# Altium PCB Display_System_pcb.PcbDoc (part 1 of 3)
Units mm, origin at the board's own origin, x right, y up, seen from the top; angles counter-clockwise.
Board outline 72.5 x 81 mm, 4 copper layers (Top Layer, VCC, GND, Bottom Layer); 86 components, 79 nets, 327 pads, 149 vias.
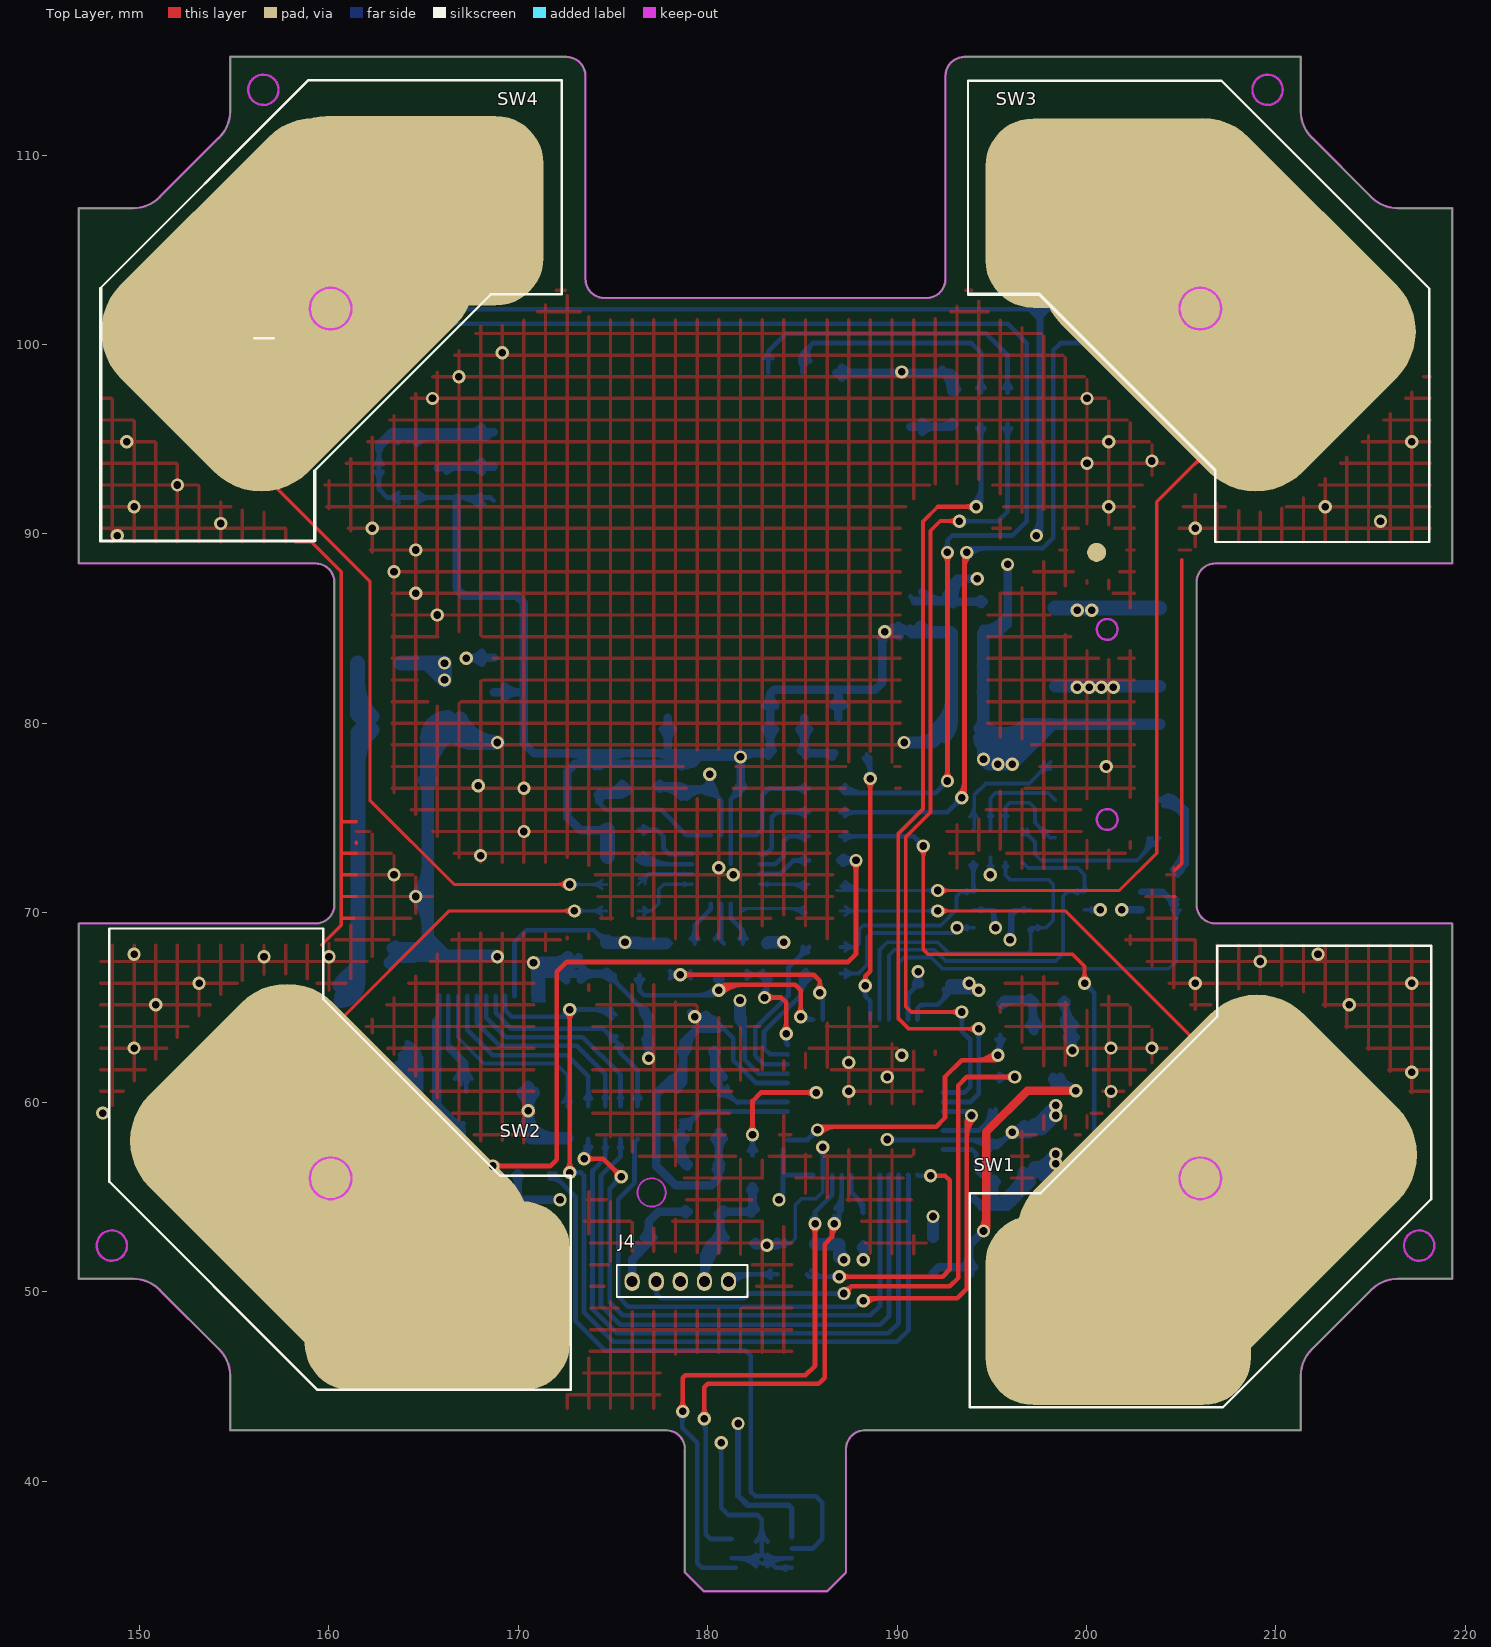
[diagram p0: Top Layer view]
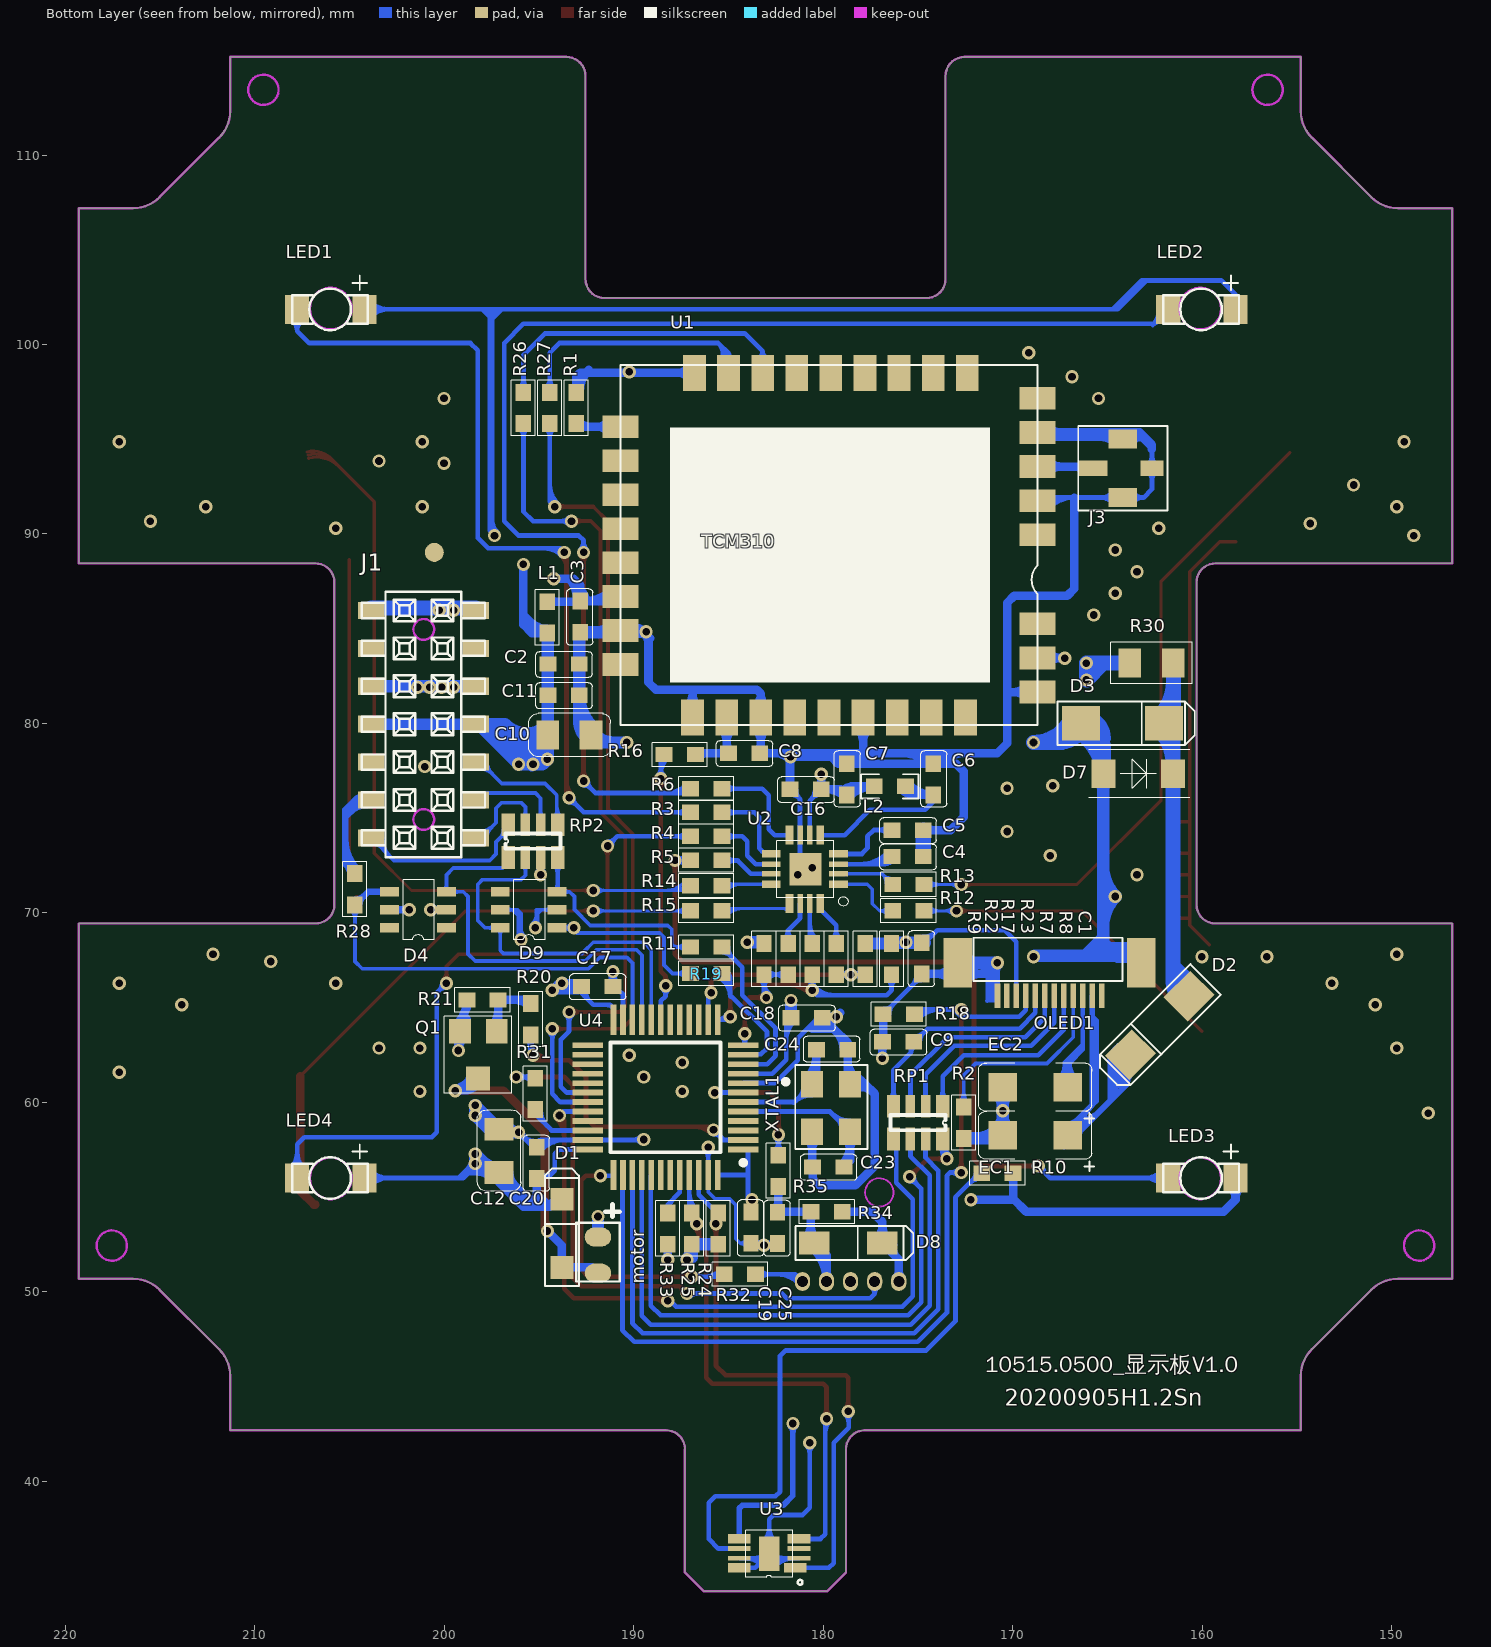
[diagram p1: Bottom Layer view, seen from below]
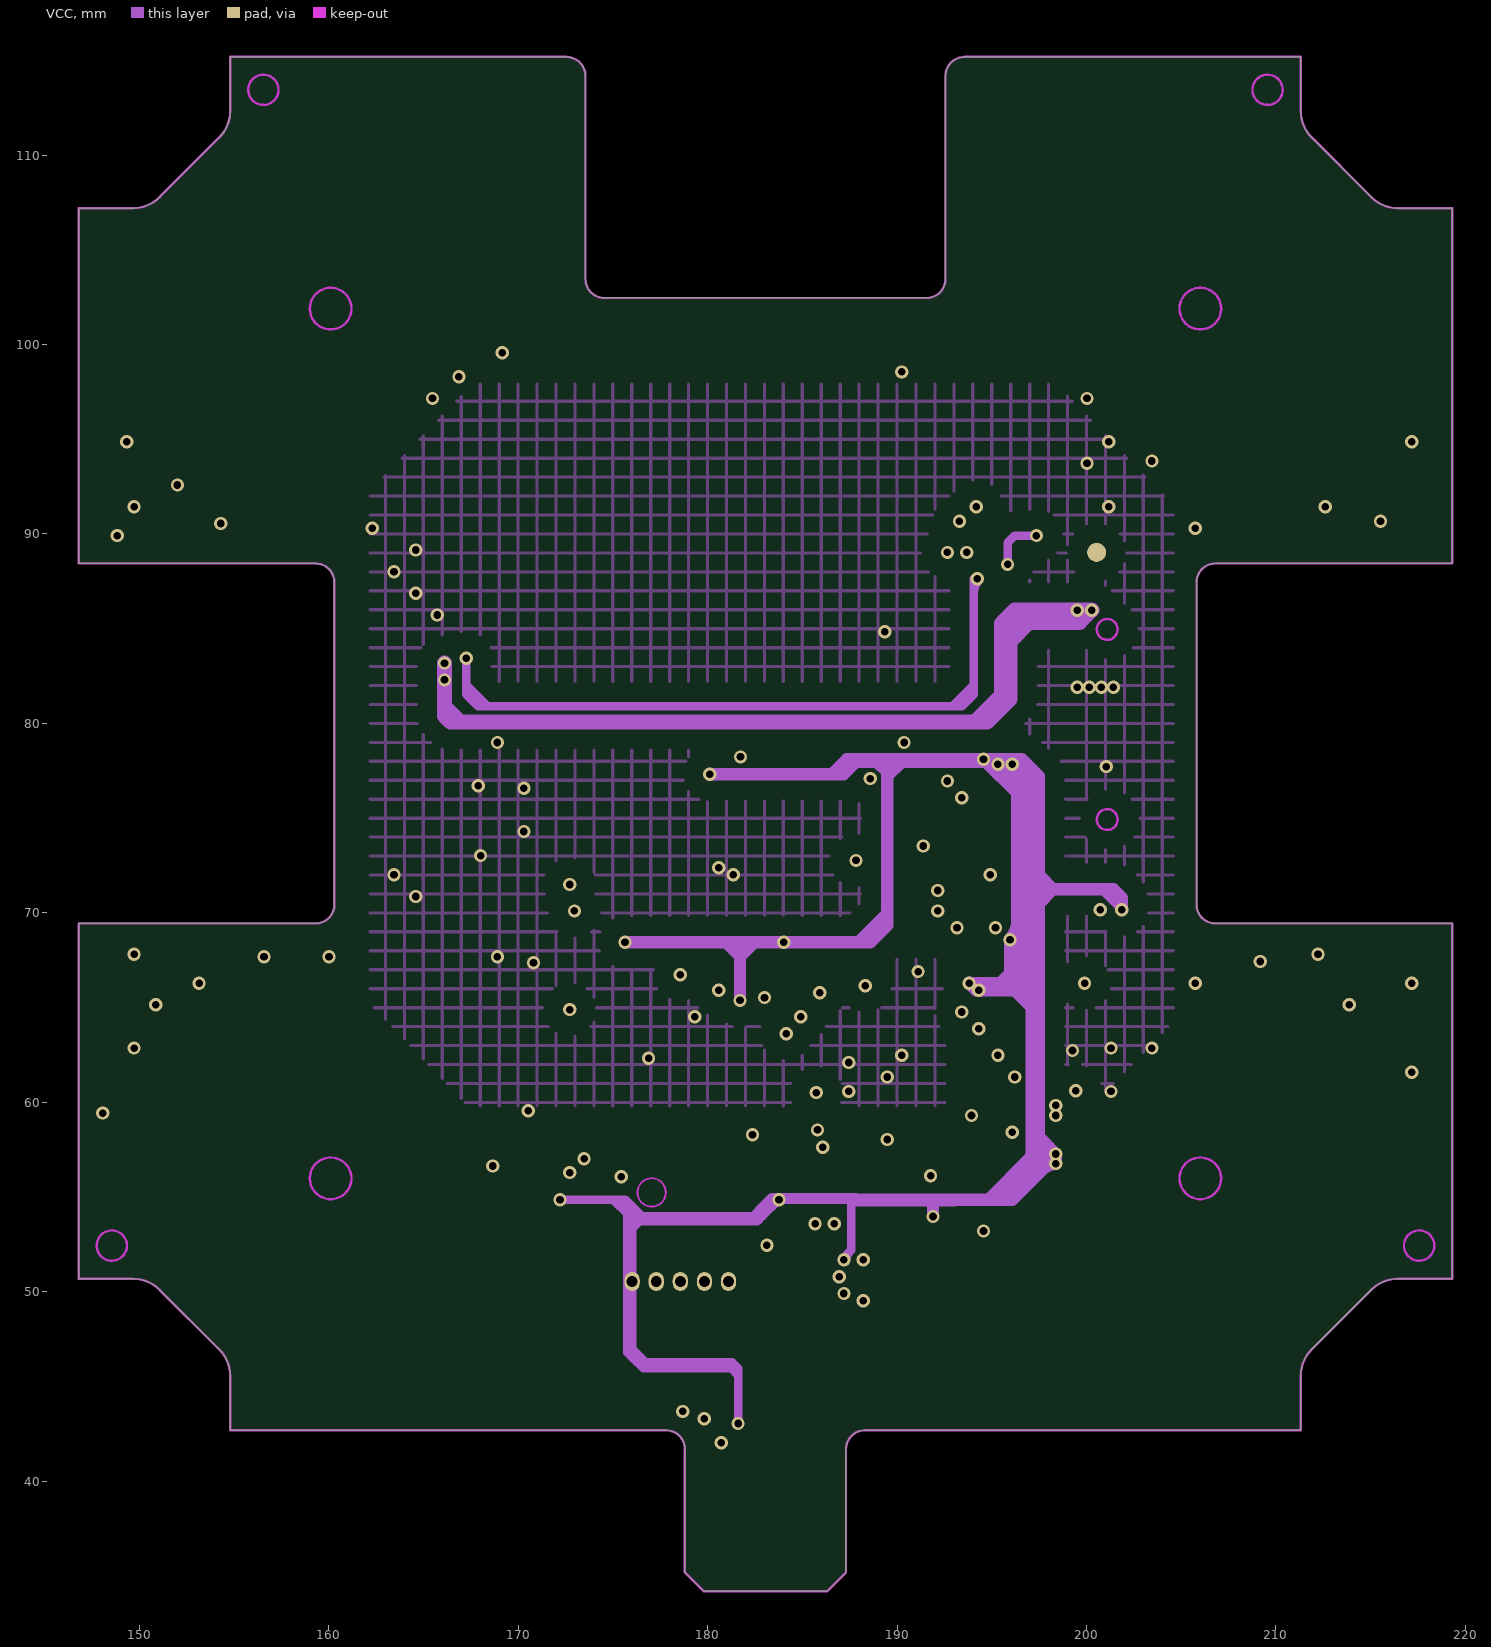
[diagram p2: VCC]
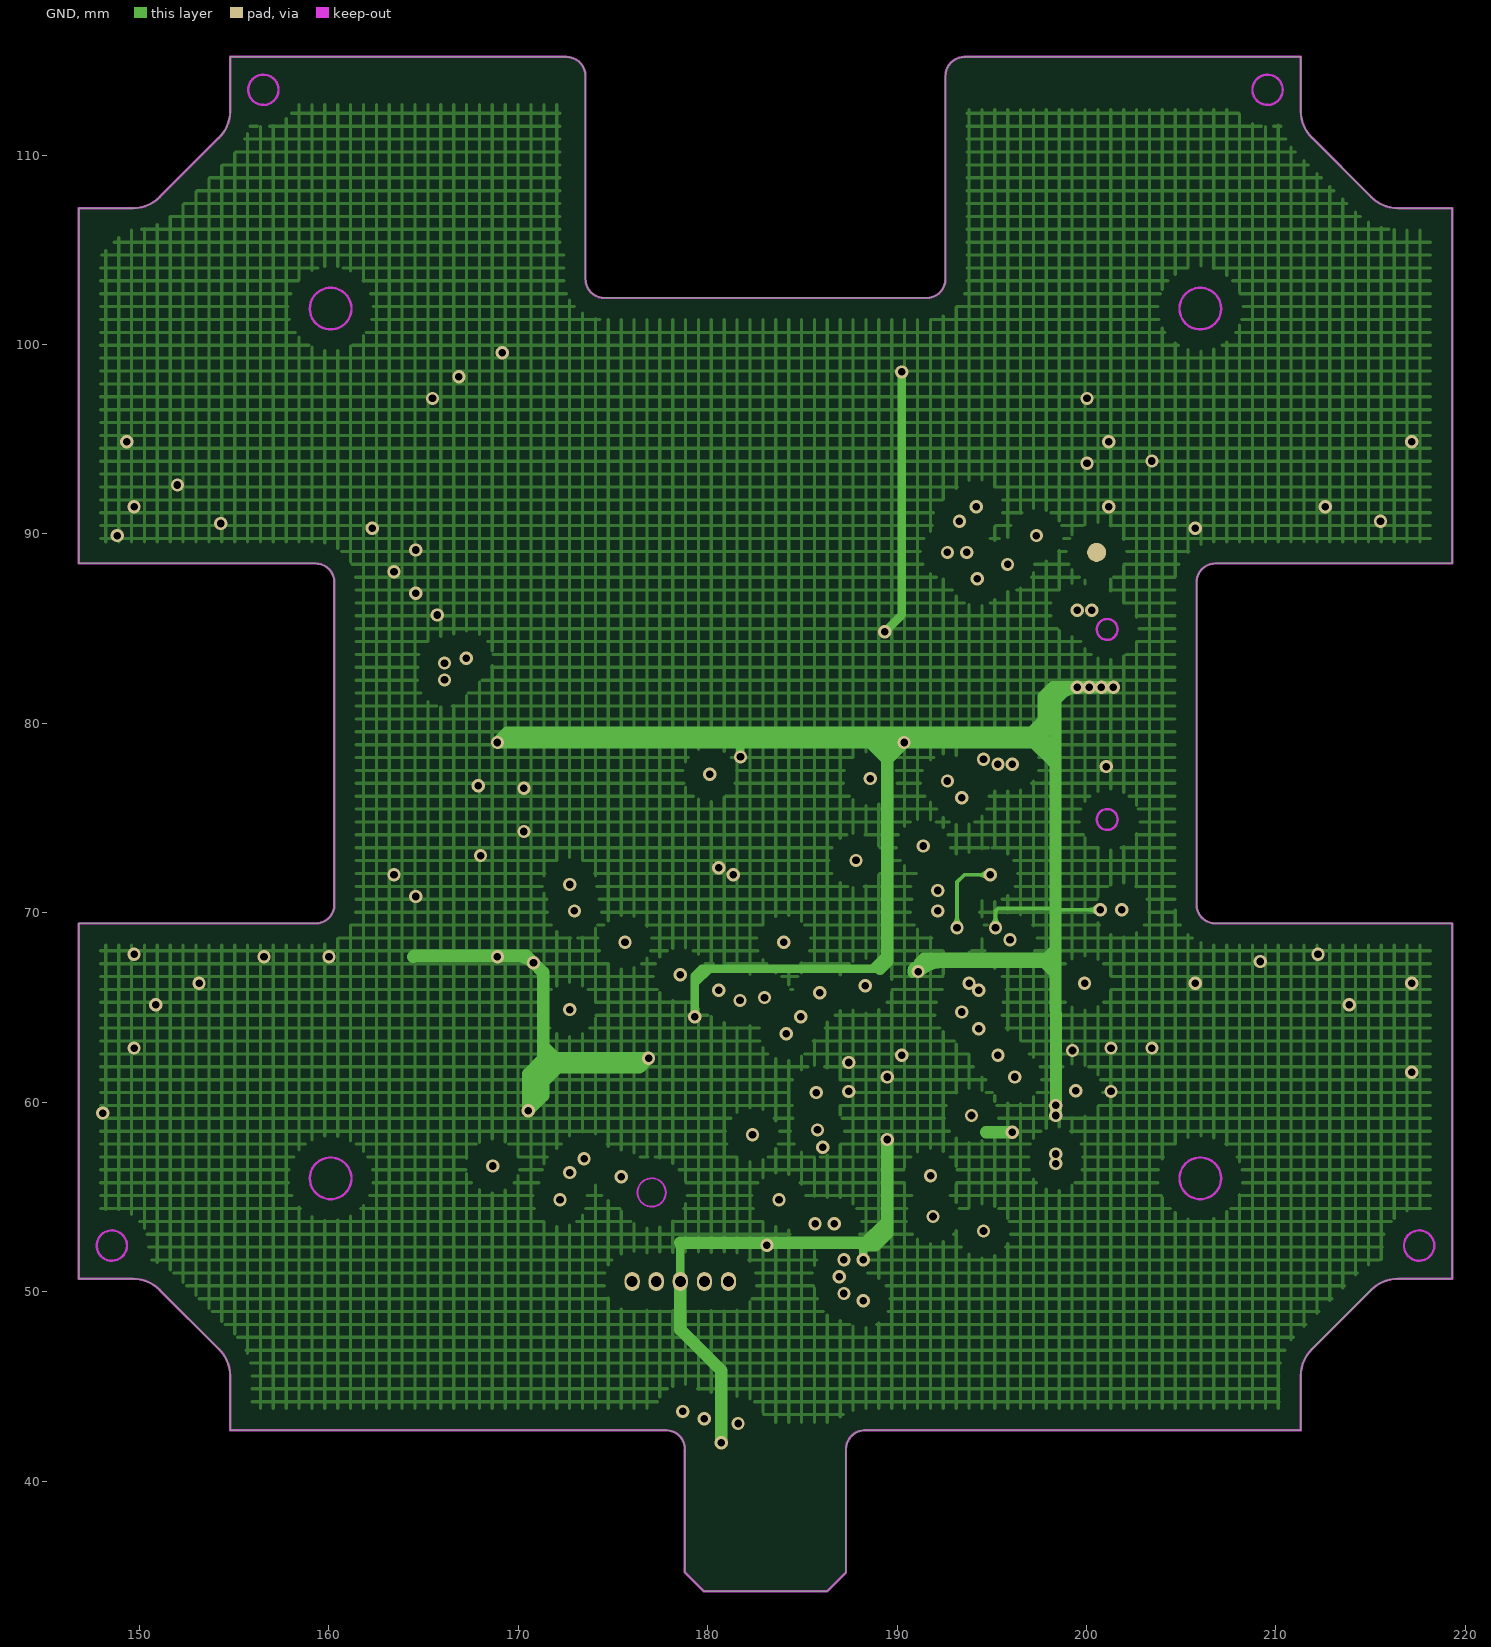
[diagram p3: GND]
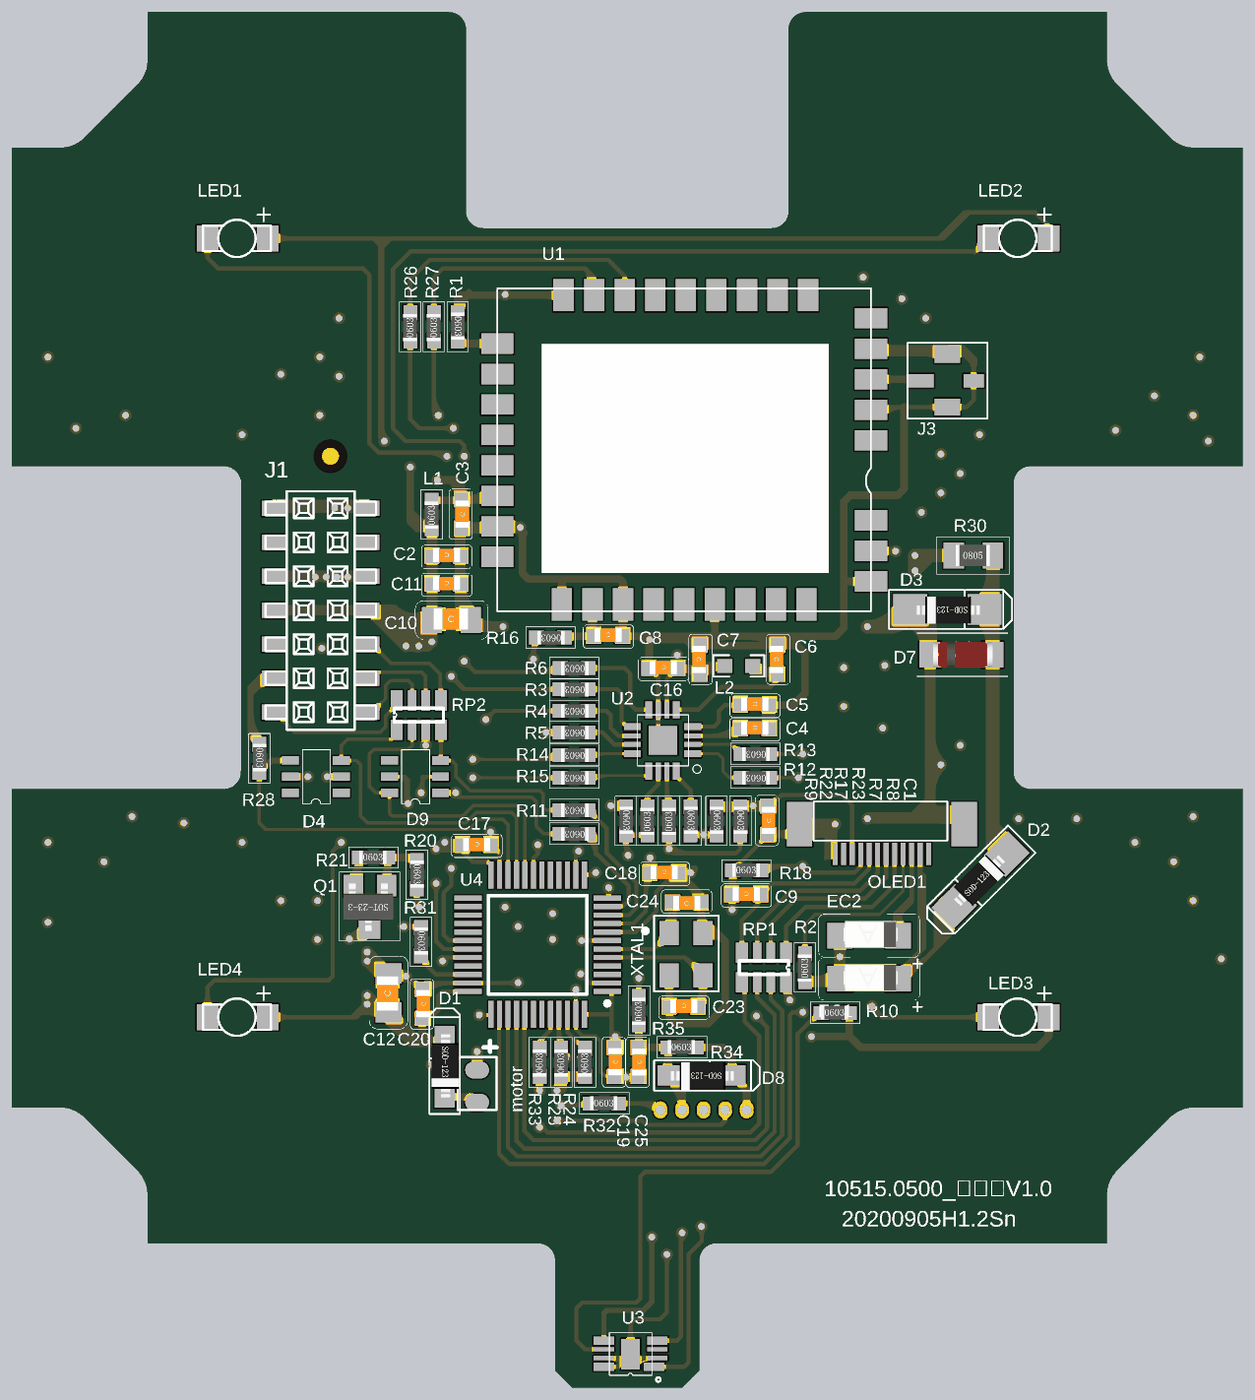
[diagram p6: 3D render of the assembled board from below, using the file's embedded part models]

## Layer stack, top to bottom
Top Layer: signal copper 0.0356
Dielectric: core 0.32, FR-4, Dk 4.8
VCC: signal copper 0.0356
Dielectric: prepreg 0.32, FR-4, Dk 4.8
GND: signal copper 0.0356
Dielectric: core 0.32, FR-4, Dk 4.8
Bottom Layer: signal copper 0.0356

## Board outline
149.667,50.693 cw(c149.667,48.693) 151.081,50.107 154.221,46.967 cw(c152.807,45.553) 154.807,45.553 154.807,42.693 177.807,42.693 cw(c177.807,41.693) 178.807,41.693 178.807,35.193 179.807,34.193 186.307,34.193 187.307,35.193 187.307,41.693 cw(c188.307,41.693) 188.307,42.693 211.307,42.693 211.307,45.553 cw(c213.307,45.553) 211.893,46.967 215.032,50.107 cw(c216.446,48.693) 216.446,50.693 219.307,50.693 219.307,69.443 206.807,69.443 cw(c206.807,70.443) 205.807,70.443 205.807,87.443 cw(c206.807,87.443) 206.807,88.443 219.307,88.443 219.307,107.193 216.446,107.193 cw(c216.446,109.193) 215.032,107.778 211.893,110.918 cw(c213.307,112.332) 211.307,112.332 211.307,115.193 193.557,115.193 193.557,115.173 ccw(c193.557,114.173) 192.557,114.173 192.557,103.455 cw(c191.557,103.455) 191.557,102.455 174.557,102.455 cw(c174.557,103.455) 173.557,103.455 173.557,114.173 ccw(c172.557,114.173) 172.557,115.173 172.557,115.193 154.807,115.193 154.807,112.332 cw(c152.807,112.332) 154.221,110.918 151.081,107.778 cw(c149.667,109.193) 149.667,107.193 146.807,107.193 146.807,88.443 159.307,88.443 cw(c159.307,87.443) 160.307,87.443 160.307,70.443 cw(c159.307,70.443) 159.307,69.443 146.807,69.443 146.807,50.693

## Design rules (kind name [scope] priority, off if disabled: settings)
Clearance Clearance_1 [InPolygon] p1: gap=1
Clearance [All] p2: gap=0.2
HoleSize [All] p1 off: absolutevalues=TRUE maxlimit=2.54 minlimit=0.025 maxpercent=80.000 minpercent=20.000
HoleToHoleClearance [All] p1 off: gap=0.254 allowstackedmicrovias=TRUE
LayerPairs [All] p1 off: enforce=TRUE
MinimumSolderMaskSliver [All] p1 off: minsoldermaskwidth=0.254
NetAntennae [All] p1 off: netantennaetolerance=0
PolygonConnect PolygonConnect_1 [IsVia] p1: connectstyle=Direct reliefconductorwidth=0.254 reliefentries=4 polygonreliefangle="90 Angle"
PolygonConnect [All] p2: connectstyle=Relief reliefconductorwidth=0.254 reliefentries=4 polygonreliefangle="90 Angle"
RoutingVias [All] p1: holewidth=0.711 width=1.27 viastyle="Through Hole" minholewidth=0.711 minwidth=1.27 maxholewidth=0.711 maxwidth=1.27
SilkToSilkClearance [All] p1 off: silktosilkclearance=0.254
SilkscreenOverComponentPads [IsPad] p1 off: minsilkscreentomaskgap=0.254
SolderMaskExpansion [All] p1: expansion=0.102
Width [All] p1: maxlimit=0.8 minlimit=0.15 preferedwidth=0.45
21 further rules are at their usual default settings.

## Components (designator, comment, footprint, x,y, rotation, side; value= is the part's Value field where it differs from the comment)
C1 "0.1uF/0603" CAP/SMT/0603C 174.752,66.802 r90 bottom
C2 "0.1uF/0603" CAP/SMT/0603C 192.913,83.185 r0 bottom
C3 "0.1uF/0603" CAP/SMT/0603C 192.786,84.836 r90 bottom
C4 "2.2nF/0603" CAP/SMT/0603C 174.752,73.025 r0 bottom
C5 "0.1uF/0603" CAP/SMT/0603C 174.752,74.422 r0 bottom
C6 "0.1uF" CAP/SMT/0603C 174.244,77.851 r270 bottom
C7 "0.1uF/0603" CAP/SMT/0603C 178.816,77.851 r270 bottom
C8 "0.1uF" CAP/SMT/0603C 183.388,78.486 r0 bottom
C9 "0.1uF" CAP/SMT/0603C 175.26,63.246 r0 bottom
C10 "22uF/0805" CAP/SMT/0805C 194.564,79.375 r180 bottom
C11 "1uF/0603" CAP/SMT/0603C 192.913,81.534 r0 bottom
C12 "22uF/0805" CAP/SMT/0805C 197.104,56.285 r90 bottom
C16 "0.1uF/0603" CAP/SMT/0603C 180.137,76.581 r0 bottom
C17 "0.1uF/0603" CAP/SMT/0603C 191.135,66.167 r0 bottom
C18 "1uF/0603" CAP/SMT/0603C 180.086,64.516 r0 bottom
C19 "0.1uF/0603" CAP/SMT/0603C 183.769,52.588 r90 bottom
C20 "0.1uF/0603" CAP/SMT/0603C 195.072,56.007 r90 bottom
C23 "20pF/0603" CAP/SMT/0603C 178.943,56.642 r0 bottom
C24 "20pF/0603" CAP/SMT/0603C 180.34,62.738 r180 bottom
C25 "0.1uF/0603" CAP/SMT/0603C 182.372,52.578 r90 bottom
D1 "1N4148/SOD-123" D/SMT/SOD-123#1 193.802,53.086 r270 bottom
D2 "1N4007-SOD123" D/SMT/SOD123 163.957,62.357 r135 bottom
D3 "SMF13CA/SOD-123" D/SMT/SOD123 161.798,80.01 r0 bottom
D4 "SR05-4B/SOT-363" TSOT-6L 199.898,69.215 r0 bottom
D7 "ZMM12V" D/SMT/SOD-80 161.544,77.343 r0 bottom
D8 "1N4148/SOD-123" D/SMT/SOD-123#2 178.689,52.578 r0 bottom
D9 "SR05-4B/SOT-363" TSOT-6L 194.056,69.215 r0 bottom
EC1 "4.7uF/25V" CAP/SMT/TAJA106M010RNJ 167.132,58.166 r0 bottom
EC2 "4.7uF/25V" CAP/SMT/TAJA106M010RNJ 167.132,60.706 r0 bottom
J1 "CON/2X7PIN" CON/SMT/2×7PIN/2.0MM 202.057,75.978 r180 bottom locked
J3 "Antena_W.FL-LP" W.FL.LP-3MM 164.211,93.472 r90 bottom
J4 "CON/DIP/1X5PIN_2MM" CON/DIP/1X5PIN/1.27MM 176.022,50.546 r0 top
L1 "10uH/0603/磁珠" 0603R 194.564,85.598 r90 bottom
L2 "L/10uH" L/SMT/0603L 177.292,76.708 r180 bottom
LED1 "led/1206" D/SMT/LED/1206 207.772,101.854 r180 bottom
LED2 "led/1206" D/SMT/LED/1206 161.798,101.854 r180 bottom
LED3 "led/1206" D/SMT/LED/1206 161.798,56.007 r180 bottom locked
LED4 "led/1206" D/SMT/LED/1206 207.772,56.007 r180 bottom
motor "motor" MOTOR 191.897,51.943 r0 bottom
OLED1 "M80481/SPI" OLED/M80481/6701 170.815,65.77 r0 bottom
Q1 "NPN_SS8050" BJT/SMT/SOT-23 197.231,63.754 r0 bottom
R1 "10K/0603" 0603R 193.04,96.647 r270 bottom
R2 "910K/0603" 0603R 172.593,58.928 r90 bottom
R3 "1K/0603" 0603R 186.182,75.311 r0 bottom
R4 "1K/0603" 0603R 186.182,74.041 r0 bottom
R5 "1K/0603" 0603R 186.182,72.771 r0 bottom
R6 "1K/0603" 0603R 186.182,76.558 r0 bottom
R7 "10K/0603" 0603R 177.8,67.564 r270 bottom
R8 "10K/0603" 0603R 176.403,67.564 r270 bottom
R9 "10K/0603" 0603R 183.134,67.564 r270 bottom
R10 "10K/0603" 0603R 170.815,56.261 r180 bottom
R11 "10R/0603" 0603R 186.182,68.199 r0 bottom
R12 "560R/0603" 0603R 175.514,70.104 r0 bottom
R13 "560R/0603" 0603R 175.514,71.501 r0 bottom
R14 "560R/0603" 0603R 186.182,71.438 r0 bottom
R15 "560R/0603" 0603R 186.182,70.104 r0 bottom
R16 "10R/0603" 0603R 187.579,78.359 r0 bottom
R17 "10R/0603" 0603R 179.324,67.564 r270 bottom
R18 "100R/0603" 0603R 176.022,64.643 r180 bottom
R19 "10R/0603" 0603R 186.182,66.802 r0 bottom
R20 "4.7K/0603" 0603R 195.453,64.389 r270 bottom
R21 "4.7K/0603" 0603R 197.993,65.405 r180 bottom
R22 "10R/0603" 0603R 181.864,67.564 r90 bottom
R23 "10R/0603" 0603R 180.594,67.564 r90 bottom
R24 "10K/0603" 0603R 185.547,53.34 r90 bottom
R25 "10K/0603" 0603R 186.944,53.34 r90 bottom
R26 "10R/0603" 0603R 195.834,96.647 r90 bottom
R27 "10R/0603" 0603R 194.437,96.647 r90 bottom
R28 "10R/0603" 0603R 204.724,71.247 r270 bottom
R30 "PRG21BC2R2MM1RK" 0805R 163.83,83.185 r180 bottom
R31 "20R/0603" 0603R 195.199,60.452 r270 bottom
R32 "20R/0603" 0603R 184.404,50.927 r180 bottom
R33 "10K/0603" 0603R 188.214,53.34 r90 bottom
R34 "10K/0603" 0603R 179.832,54.229 r180 bottom
R35 "430R/0603" 0603R 182.372,56.388 r90 bottom
RP1 "10R/0603/1/8W/±5%" 0603R*4 175.006,58.928 r0 bottom
RP2 "10R/0603/1/8W/±5%" 0603R*4 195.326,73.787 r180 bottom
SW1 "TOUCH" "SWITCH/TOUCH /四叶草"#1 207.01,57.023 r180 top locked
SW2 "TOUCH" "SWITCH/TOUCH /四叶草"#2 161.544,56.007 r90 top locked
SW3 "TOUCH" "SWITCH/TOUCH /四叶草"#3 204.978,102.743 r270 top locked
SW4 "TOUCH" "SWITCH/TOUCH /四叶草"#4 159.131,100.838 r0 top locked
U1 "TCM310" TCM310 179.705,89.408 r0 bottom locked
U2 "CY8CMBR3108" QFN-16 180.975,72.39 r0 bottom
U3 "SENSOR/SHT30" SENSOR/SHT30 181.61,34.925 r0 bottom
U4 "STM32L072CBT6" TQFP48 184.277,57.531 r0 bottom locked
XTAL1 "OSC 12MHZ" OSC/SMT/12M 180.594,60.96 r180 bottom

## Footprints (in the part's own frame and the unit in brackets; to place one, negate y for a bottom-side part, rotate by r counter-clockwise, add the part's x,y. Pads: shape width x height; smd on the part's side, far side on the other; paste and mask are expansions set on the pad)
0603R [mil]
  rect 35x32 smd: 1(-32.5,0) 2(32.5,0)
  silkscreen extent -58,-25 58,25, body extent -33,-15 30,16, height 18
0603R*4 [mm]
  rect 0.7x1.2 smd: 1(-1.3,-0.865) 4(1.3,-0.865) 5(1.3,0.865) 8(-1.3,0.865)
  rect 0.5x1.2 smd: 2(-0.4,-0.865) 3(0.4,-0.865) 6(0.4,0.865) 7(-0.4,0.865)
  silkscreen extent -1.45,-0.4 1.45,0.4
0805R [mm]
  rect 1.2x1.524 smd: 1(0,0) 2(2.3,0)
  silkscreen extent -1,-1.1 3.3,1.1, body extent 0.13,-0.64 2.13,0.62, height 0.55
BJT/SMT/SOT-23 [mm] "transistor 1base 2emitter 3collector"
  rect 1.143x1.27 smd: 1(0,0) 2(1.95,0)
  rect 1.27x1.27 smd: 3(1,2.5)
  silkscreen extent -0.78,-0.8 2.78,3.26, body extent -0.38,-0.13 2.52,2.67, height 1.2
CAP/SMT/0603C [mil]
  rect 35x32 smd: 1(-1,1.97) 2(64,1.97)
  silkscreen extent -28,-24 89,30, body extent -20,-20 82,19, height 35
CAP/SMT/0805C [mm]
  rect 1.2x1.524 smd: 1(0.01,0.01) 2(2.296,0.01)
  silkscreen extent -0.99,-1.13 3.32,1.15, body extent -0.38,-0.64 2.62,0.76, height 0.93
CAP/SMT/TAJA106M010RNJ [mm]
  rect 1.5x1.5 smd: 1(-0.025,-0.102) 2(3.404,-0.102)
  silkscreen extent -1.42,-1.37 4.68,1.8, body extent 0,-0.97 3.2,0.64, height 1.6
CON/DIP/1X5PIN/1.27MM [mm]
  oval 0.8x1 hole 0.58: 1(0,0) 2(1.27,0) 3(2.54,0) 4(3.81,0) 5(5.08,0)
  silkscreen extent -0.81,-0.81 6.1,0.86
CON/SMT/2×7PIN/2.0MM [mm]
  rect 1.4x0.9 smd: 1(-1.803,9.982) 2(-1.803,7.983) 3(-1.803,5.984) 4(-1.803,3.984) 5(-1.803,1.985) 6(-1.803,-0.015) 7(-1.803,-2.014) 8(3.708,9.982) 9(3.708,7.983) 10(3.708,5.984) 11(3.708,3.984) 12(3.708,1.985) 13(3.708,-0.015) 14(3.708,-2.014)
  silkscreen extent -2.3,-3.05 4.2,10.98
D/SMT/LED/1206 [mil]
  rect 50x60 smd: 1(0,0) 2(140,0)
  silkscreen extent -10,-43 147,70
D/SMT/SOD123 [mm]
  rect 2x1.8 smd: 1(0.229,0) 2(4.597,0)
  silkscreen extent -1.4,-1.14 5.84,1.14, body extent 0.21,-2.11 4.51,2.19, height 1.2
D/SMT/SOD-80 [mil]
  rect 50x60 smd: 1(0,0) 2(145,0)
  silkscreen extent -35,-50 175,50, body extent 0,-30 138,29, height 59
D/SMT/SOD-123#1 [mm]
  rect 1.2x1.2 smd: 1(-1.8,0) 2(1.8,0)
  silkscreen extent -3.43,-0.9 2.78,0.9, body extent -1.91,-0.76 1.79,0.84, height 1.2
D/SMT/SOD-123#2 [mm]
  rect 1.6x1.2 smd: 1(-1.8,0) 2(1.8,0)
  silkscreen extent -3.43,-0.9 2.78,0.9, body extent -1.91,-0.76 1.79,0.84, height 1.2
L/SMT/0603L [mil]
  rect 35x32 smd: 1(-1,-1) 2(64,-1)
  silkscreen extent -28,-26 91,24
MOTOR [mm]
  oval 1.4x1 smd: 1(0,0.953) 2(0,-0.953)
  silkscreen extent -1.14,-1.71 1.14,1.4
OLED/M80481/6701 [mm]
  rect 0.3x1.3 smd: 1(0,0.15) 2(-0.5,0.15) 3(-1,0.15) 4(-1.5,0.15) 5(-2,0.15) 6(-2.5,0.15) 7(-3,0.15) 8(-3.5,0.15) 9(-4,0.15) 10(-4.5,0.15) 11(-5,0.15) 12(-5.5,0.15)
  rect 1.5x2.6 smd: 13(-7.6,-1.6) 14(2.1,-1.6)
  silkscreen extent -6.6,-2.92 1.27,-0.64
OSC/SMT/12M [mm]
  rect 1.15x1.4 smd: 1(0,0) 2(0,-2.5) 3(2,-2.5) 4(2,0)
  silkscreen extent -1.52,-3.43 2.92,1.02
QFN-16 [mm]
  rect 1x0.4 smd: 1(-1.778,0.875) 4(-1.778,-0.724) 9(1.778,-0.724) 12(1.778,0.875)
  rect 1x0.3 smd: 2(-1.778,0.326) 3(-1.778,-0.175) 10(1.778,-0.175) 11(1.778,0.326)
  rect 0.4x1 smd: 5(-0.812,-1.714) 8(0.812,-1.714) 13(0.812,1.905) 16(-0.812,1.905)
  rect 0.3x1 smd: 6(-0.254,-1.714) 7(0.254,-1.714) 14(0.254,1.905) 15(-0.254,1.905)
  rect 1.7x1.7 smd: 17(-0.024,0.088)
  silkscreen extent -2.28,-1.41 1.48,2.03
SENSOR/SHT30 [mm]
  rect 1.2x0.5 smd: 1(-0.127,-0.508) 4(-0.327,-2.032) 5(2.827,-2.032) 8(2.827,-0.508)
  rect 1.2x0.25 smd: 2(-0.327,-1.016) 3(-0.327,-1.524) 6(2.827,-1.524) 7(2.827,-1.016)
  rect 1.1x1.8 smd: 2(1.25,-1.25)
  silkscreen extent 0,-2.5 2.5,0
"SWITCH/TOUCH /四叶草"#1 [mm]
  rrect50% 20x14 smd rot 45: 1(0.135,1.905)
  silkscreen extent -11.18,-11.23 13.17,13.12
"SWITCH/TOUCH /四叶草"#2 [mm]
  rrect50% 20x13.75 smd rot 45: 1(-0.254,1.516)
  silkscreen extent -11.18,-11.23 13.17,13.12
"SWITCH/TOUCH /四叶草"#3 [mm]
  rrect50% 18x14 smd rot 45: 1(0.643,2.54)
  silkscreen extent -11.18,-11.23 13.17,13.12
"SWITCH/TOUCH /四叶草"#4 [mm]
  rrect50% 18x14 smd rot 45: 1(-1.27,1.262)
  silkscreen extent -11.18,-11.23 13.17,13.12
TCM310 [mm]
  rect 1.9x1.2 smd: 1(-11,7.75) 2(-11,5.95) 3(-11,4.15) 4(-11,-0.55) 5(-11,-2.35) 6(-11,-4.15) 7(-11,-5.95) 8(-11,-7.75) 18(11,-6.25) 19(11,-4.457) 20(11,-2.664) 21(11,-0.871) 22(11,0.921) 23(11,2.714) 24(11,4.507) 25(11,6.3)
  rect 1.2x1.9 smd: 9(-7.3,-9.1) 10(-5.5,-9.1) 11(-3.7,-9.1) 12(-1.9,-9.1) 13(-0.1,-9.1) 14(1.7,-9.1) 15(3.5,-9.1) 16(5.3,-9.1) 17(7.1,-9.1) 26(7.2,9.1) 27(5.4,9.1) 28(3.6,9.1) 29(1.8,9.1) 30(0,9.1) 31(-1.8,9.1) 32(-3.6,9.1) 33(-5.4,9.1) 34(-7.2,9.1)
  silkscreen extent -11,-9.5 11,9.5
TQFP48 [mm]
  rect 1.6x0.3 smd: 1(-0.047,0.014) 2(-0.047,-0.486) 3(-0.047,-0.986) 4(-0.047,-1.486) 5(-0.047,-1.986) 6(-0.047,-2.486) 7(-0.047,-2.986) 8(-0.047,-3.486) 9(-0.047,-3.986) 10(-0.047,-4.486) 11(-0.047,-4.986) 12(-0.047,-5.486) 25(8.153,-5.486) 26(8.153,-4.986) 27(8.153,-4.486) 28(8.153,-3.986) 29(8.153,-3.486) 30(8.153,-2.986) 31(8.153,-2.486) 32(8.153,-1.986) 33(8.153,-1.486) 34(8.153,-0.986) 35(8.153,-0.486) 36(8.153,0.014)
  rect 0.3x1.6 smd: 13(1.303,-6.836) 14(1.803,-6.836) 15(2.303,-6.836) 16(2.803,-6.836) 17(3.303,-6.836) 18(3.803,-6.836) 19(4.303,-6.836) 20(4.803,-6.836) 21(5.303,-6.836) 22(5.803,-6.836) 23(6.303,-6.836) 24(6.803,-6.836) 37(6.803,1.364) 38(6.303,1.364) 39(5.803,1.364) 40(5.303,1.364) 41(4.803,1.364) 42(4.303,1.364) 43(3.803,1.364) 44(3.303,1.364) 45(2.803,1.364) 46(2.303,1.364) 47(1.803,1.364) 48(1.303,1.364)
  silkscreen extent -0.17,-5.64 6.95,0.84
TSOT-6L [mm]
  rect 1x0.5 smd: 1(0,0) 2(0,-0.95) 3(0,-1.9) 4(3,-1.905) 5(3,-0.95) 6(3,0)
  silkscreen extent 0.64,-2.54 2.29,0.64
W.FL.LP-3MM [mm]
  rect 1x1.5 smd: 1(1.55,0) 2(-1.55,0)
  rect 0.8x1.5 smd: 3(0,1.55)
  rect 0.8x1.2 smd: 4(0,-1.55)
  silkscreen extent -2.24,-2.36 2.24,2.34

## Part data
C1 C2 C3 C4 C5 C6 C7 C8 C9 C11 C16 C17 C18 C19 C20 C23 C24 C25: library part CAP/CAP/SMT/0603C
C10 C12: library part CAP/CAP/SMT/0805C
D1 D8: library part D/D/SMT/1N4148/SOD-123, "VR=75V T(-65-175)P(0.5W)VF=0.6V"
D2: library part D/D/SMT/1N4007-SOD123
D3: library part D/TVS/SMT/SMF13CA/SOD-123
D4 D9: library part D/TVS/SMT/SR05-4B/SOT-363
D7: library part D/ZENER/SMT/ZMM8V2/SOD80
EC1 EC2: library part CAP/TEC/SMT/TAJA106M010RNJ
J1: library part CON/SMT/2X7PIN/2MM
J3: library part OTHER/Antena
J4: "Connector"
L1: library part INDUCTOR1
L2: library part L/BEAD/SMT/0603L
LED1 LED2 LED3 LED4: library part D/LED/SMT/WEJT81GC/1206
motor: library part OTHER/MOTOR
OLED1: library part OLED/M80481/SPI, "OLED/M80481"
Q1: library part BJT/NPN/SMT/SS8050/SOT-23
R1: library part Res, "Resistor"
R2 R3 R4 R5 R6 R7 R8 R9 R10 R11 R12 R13 R14 R15 R16 R17 R18 R19 R20 R21 R22 R23 R24 R25 R26 R27 R28 R33 R34 R35: library part RES/RES/SMT/0603
R30: library part RES/RES/SMT/0805
R31: library part Res1, "Resistor"
R32: library part A_Res_0805, "Resistor"
RP1 RP2: library part "RES /PACKS/SMT/0603*4", "Isolated Resistor Network"
SW1 SW2 SW3 SW4: library part SWITCH/TOUCH/SMT/四叶草
U1: library part TCM_310
U2: library part IC/TOUCH/CY8CMBR3108/QFN16
U3: "温湿度传感器"
U4: library part MCU/SMT/STM32L072CBT6/LQFP48
XTAL1: library part XTAL/SMT/OSC12MHZ-2

## Free pads (board coordinates)
  rrect50% 14x10 smd: 0(164.338,107.061) 0(165.735,49.784) 0(201.676,49.022) 0(201.676,106.934)
  round 2 on Top Solder: 0(200.533,89.027)
  round 1 all layers, no hole: 0(200.533,89.027)
  round 2 on Bottom Solder: 0(200.533,89.027)

## Via types
v1: diameter 0.7, hole 0.4, Top Layer to Bottom Layer, tented both sides, 149 vias

## Nets (pads, with @x,y where several pads share a name; then routed paths per layer and width w, separated by ;. In a path a pad name is that pad's centre, name@x,y a point inside that pad or via, vN(x,y) a via of type N, cw(c..) or ccw(c..) an arc to the next point about the centre after c; other vN are vias at no path point)
+3.3V: C1.2 C2.2 C7.2 C10.1 C11.2 C12.1 C16.1 C17.2 C18.2 C19.2 C20.1 D1.1 D4.5 D8.1 D9.5 J1.4 J1.11 J4.1 L1.1 L2.1 LED1.2 LED2.2 LED3.2 LED4.2 motor.2 OLED1.3 R7.1 R8.1 R9.1 R10.2 R24.1 R25.1 R34.2 U2.6 U3.5 U4.1 U4.9 U4.24 U4.36 U4.48 | length 554.6
  VCC w0.2: v1(195.961,68.58) 196.342,68.961 ; v1@195.982,68.829 ccw(c196.02,69.283) 196.342,68.961 ; v1@196.21,68.601 cw(c196.664,68.639) 196.342,68.961 ; 196.723,68.961 196.342,68.961
  VCC w0.45: v1(172.212,54.864) 175.006,54.864 ; 175.768,49.41 cw(c177.058,49.41) 176.146,50.322 ccw(c176.444,50.024) 176.022,50.024 ccw(c175.6,50.024) J4.1@175.898,50.322 ; 175.768,51.682 ccw(c177.058,51.682) 176.146,50.77 cw(c176.444,51.068) 176.022,51.068 cw(c175.6,51.068) J4.1@175.898,50.77 ; 176.022,53.34 176.403,53.721 182.626,53.721 182.901,53.996 ; 176.533,53.996 175.665,54.864 175.514,54.864 ; v1(181.61,43.053) 181.61,45.593 ; v1@187.071,51.689 187.579,52.197 187.579,54.737 ; v1@187.323,51.689 cw(c187.931,51.689) 187.501,52.119 ; 187.833,54.991 183.388,54.991 182.944,54.546 ; 191.339,54.864 188.087,54.864 187.579,54.864 ; 192.151,54.737 191.897,54.737 ; 193.04,54.737 191.897,54.737 ; v1(195.834,88.392) 195.834,89.535 196.215,89.916 v1(197.358,89.916) ; 175.006,54.864 175.768,54.102 175.768,46.799 176.022,46.545 ; 175.006,54.864 175.514,54.864 ; 175.514,54.864 176.022,54.356 176.022,54.229 ; 176.022,46.545 176.022,46.99 ; 176.022,46.545 176.276,46.291 ; 176.022,46.99 176.72,46.291 ; 176.022,46.99 J4.1@176.022,50.546 176.022,54.229 ; 176.022,54.229 176.255,53.996 182.118,53.996 ; 176.276,46.291 176.594,45.974 181.229,45.974 181.61,45.593 ; 176.276,46.291 176.72,46.291 ; 176.72,46.291 181.292,46.291 181.61,45.974 181.61,45.593 ; 182.118,53.996 182.901,53.996 ; 182.118,53.996 182.393,53.996 182.944,54.546 ; 182.901,53.996 v1(183.769,54.864) ; 182.944,54.546 183.261,54.864 v1(183.769,54.864) ; v1(183.769,54.864) 187.579,54.864 ; 187.579,54.737 191.897,54.737 ; 187.579,54.737 187.579,54.864
  VCC w0.65: v1(175.641,68.453) 180.975,68.453 ; v1(180.111,77.318) 186.563,77.318 ; v1(181.712,65.38) 181.712,67.691 ; 187.579,54.864 194.818,54.864 ; v1(191.897,53.975) 191.897,54.61 ; v1@193.82,66.312 ccw(c194.782,67.274) 194.782,65.913 ; 194.163,77.964 ccw(c194.163,78.506) v1@194.546,78.123 ; v1@194.286,65.907 ccw(c193.802,65.798) v1(193.802,66.294) ; v1@194.328,65.895 cw(c195.29,64.933) 195.29,66.294 ; v1@194.582,78.123 ccw(c194.965,78.506) 194.965,77.964 ; v1@194.652,78.105 cw(c194.652,77.177) 195.308,77.833 ccw(c194.993,77.518) 194.993,77.964 ; v1(195.326,77.851) 196.342,76.835 ; v1@195.339,77.83 cw(c195.71,77.219) v1@196.215,77.724 ; v1@195.351,77.851 ccw(c196.638,77.851) 195.728,76.941 ; v1@195.414,78.105 cw(c195.414,77.177) v1@196.07,77.833 ; 195.659,77.964 ccw(c195.659,77.518) 195.344,77.833 cw(c196,77.177) v1@196,78.105 ; 195.755,77.964 cw(c195.755,77.518) v1@196.07,77.833 ; v1@195.943,68.562 cw(c194.981,67.6) 196.342,67.6 ; v1@195.943,68.598 ccw(c194.981,69.56) 196.342,69.56 ; v1(195.961,68.58) 195.961,66.802 ; v1@196.101,77.83 cw(c196.472,77.219) 196.977,77.724 ; v1@196.102,68.34 196.342,68.58 ; v1@196.109,77.838 cw(c196.596,77.528) 196.596,78.105 ; 196.342,69.342 196.342,70.612 ; 196.342,77.177 ccw(c195.414,77.177) v1@196.07,77.833 ; 197.485,56.769 197.485,57.277 ; 197.485,59.182 197.485,59.563 ; 197.681,56.457 cw(c198.374,55.764) v1@198.374,56.744 ; 197.972,57.679 cw(c197.062,56.769) v1@198.349,56.769 ; v1@198.183,56.959 197.993,56.769 ; v1@198.349,57.281 cw(c197.739,57.389) 197.739,56.769 197.993,56.769 ; v1@198.355,56.753 ccw(c197.231,55.81) 197.231,57.277 197.485,57.277 ; v1(201.864,70.165) v1@201.864,70.297 ; 180.975,68.453 181.712,67.716 ; 180.975,68.453 181.712,68.453 ; 181.712,67.691 182.474,68.453 ; 181.712,67.691 181.712,67.716 ; 181.712,67.716 181.712,68.453 ; 181.712,68.453 182.474,68.453 ; 182.474,68.453 v1(184.023,68.453) 187.96,68.453 ; 186.563,77.318 187.173,77.318 187.819,77.964 ; 186.563,77.318 187.35,78.105 187.96,78.105 ; 187.819,77.964 188.943,77.964 ; 187.819,77.964 187.96,78.105 ; 187.96,68.453 189.484,69.977 ; 187.96,68.453 188.595,68.453 189.484,69.342 189.484,69.977 ; 187.96,78.105 190.246,78.105 ; 188.943,77.964 189.484,77.964 ; 188.943,77.964 189.484,77.423 ; 189.484,69.977 189.484,77.216 ; 189.484,77.216 189.484,77.423 ; 189.484,77.216 190.232,77.964 ; 189.484,77.423 189.484,77.964 ; 189.484,77.964 190.232,77.964 ; 190.232,77.964 191.121,77.964 ; 190.232,77.964 190.246,77.978 190.246,78.105 ; 190.246,78.105 191.262,78.105 ; 191.121,77.964 191.248,77.964 ; 191.121,77.964 191.262,78.105 ; 191.248,77.964 v1@194.705,77.964 ; 191.248,77.964 191.389,78.105 ; 191.262,78.105 191.389,78.105 ; 191.389,78.105 v1(194.564,78.105) ; v1(193.802,66.294) 195.453,66.294 ; v1(193.802,66.294) 194.183,65.913 v1(194.31,65.913) 196.215,65.913 ; v1(194.564,78.105) 195.834,78.105 ; v1(194.564,78.105) v1@194.705,77.964 ; v1@194.705,77.964 196.342,76.327 ; v1@194.705,77.964 v1@195.975,77.964 ; 194.818,54.864 197.104,57.15 ; 194.818,54.864 195.326,54.864 ; 195.326,54.864 197.104,56.642 197.104,57.15 ; 195.326,54.864 196.088,54.864 197.993,56.769 ; 195.453,66.294 195.961,66.802 ; 195.453,66.294 195.961,66.294 196.342,66.675 196.342,67.183 ; 195.834,78.105 ccw(c195.834,77.528) 195.347,77.838 cw(c195.834,77.528) 195.834,78.105 ; 195.834,78.105 196.596,78.105 ; 195.834,78.105 v1@195.975,77.964 ; 195.961,66.802 196.342,67.183 ; v1@195.975,77.964 v1(196.088,77.851) 196.342,77.597 196.342,76.835 ; 196.215,65.913 196.85,66.548 ; 196.215,65.913 197.104,65.024 197.104,57.15 ; 196.215,65.913 196.85,65.913 ; 196.342,67.183 196.342,68.58 ; 196.342,68.58 196.342,68.961 196.342,70.612 ; 196.342,70.612 196.342,71.247 ; 196.342,71.247 196.342,76.327 ; 196.342,71.247 196.85,71.247 ; 196.342,76.327 196.342,76.835 ; 196.596,78.105 196.85,77.851 ; 196.85,65.913 196.85,66.548 ; 196.85,65.913 197.485,65.278 ; 196.85,66.548 197.485,65.913 ; 196.85,66.548 196.85,70.485 ; 196.85,70.485 197.485,71.12 ; 196.85,70.485 196.85,71.247 ; 196.85,71.247 197.485,71.247 ; 196.85,71.247 196.85,72.009 ; 196.85,72.009 197.485,71.374 ; 196.85,72.009 196.85,77.851 ; 196.85,77.851 197.485,77.216 197.485,72.009 ; 197.485,57.277 v1(198.374,57.277) ; 197.485,57.277 197.485,58.166 ; 197.485,58.166 v1(198.374,57.277) ; 197.485,58.166 197.485,59.563 ; 197.485,59.563 197.485,65.278 ; 197.485,65.278 197.485,65.913 ; 197.485,65.913 197.485,70.485 ; 197.485,70.485 198.247,71.247 ; 197.485,70.485 197.485,71.12 ; 197.485,71.12 197.612,71.247 ; 197.485,71.12 197.485,71.247 ; 197.485,71.247 197.612,71.247 ; 197.485,71.247 197.485,71.374 ; 197.485,71.374 197.612,71.247 ; 197.485,71.374 197.485,72.009 ; 197.485,72.009 198.247,71.247 ; 197.612,71.247 198.247,71.247 ; 197.993,56.769 v1(198.374,56.769) v1(198.374,57.277) ; 198.247,71.247 200.914,71.247 ; 200.914,71.247 v1@201.864,70.297 ; 200.914,71.247 201.422,71.247 201.864,70.805 v1@201.864,70.297 ; v1@195.334,77.827 cw(c195.646,76.873) 196.356,77.583 ccw(c195.646,76.873) v1@195.334,77.827
  Bottom Layer w0.2: v1@195.926,68.615 ccw(c195.534,69.007) 196.088,69.007 ; v1(195.961,68.58) 195.961,69.723 ; v1@196.088,68.707 196.088,69.85 ; 196.088,69.49 cw(c195.051,69.49) 195.784,68.757 ccw(c195.357,69.184) 195.961,69.184 ccw(c196.565,69.184) v1@196.138,68.757 ; D9.5@196.7,70.059 ccw(c196.444,69.803) 196.444,70.165 ccw(c196.444,70.527) D9.5@196.7,70.271 ; D9.5@197.056,70.165 196.403,70.165 ; 195.961,69.723 195.961,69.977 196.149,70.165 196.403,70.165 ; 195.961,69.723 196.088,69.85 ; 196.088,69.85 196.403,70.165
  Bottom Layer w0.25: LED2.2@158.242,101.473 158.242,102.616 159.004,103.378 162.941,103.378 ; 164.719,101.854 163.195,103.378 162.941,103.378 ; OLED1.3@169.815,65.62 169.815,68.469 170.434,69.088 173.99,69.088 C1.2@174.65,68.428 ; 174.085,68.993 ccw(c174.692,69.6) C1.2@174.775,68.746 ; R7.1@177.762,68.428 178.016,68.428 R7.1@178.054,68.389 ; C16.1@180.111,76.531 180.721,75.921 U2.6@180.721,74.105 ; C16.1@180.149,76.25 cw(c180.149,75.662) 180.565,76.078 ; C16.1@180.431,76.531 ccw(c181.202,76.531) 180.657,75.986 ; C18.2@181.551,64.267 cw(c180.549,63.265) 181.966,63.265 ; C18.2@181.727,64.444 cw(c181.153,63.869) 181.966,63.869 ; C18.2@181.966,64.466 181.966,62.257 182.705,61.517 U4.9@184.23,61.517 U4.9@184.205,61.542 ; v1@183.976,54.864 183.976,56.167 ; U4.1@183.976,57.517 183.976,56.167 ; U4.48@185.58,56.167 183.976,56.167 ; U4.24@191.08,64.367 191.08,64.969 191.262,65.151 192.151,65.151 192.761,65.761 C17.2@192.761,66.117 C17.2@192.761,66.244 ; U4.24@191.098,65 cw(c191.463,64.635) 191.463,65.151 ; 192.348,65.348 ccw(c191.937,65.76) C17.2@192.466,66 ; 192.603,65.603 ccw(c192.287,65.919) C17.2@192.694,66.104 ; C17.2@192.822,66.096 cw(c193.255,65.722) 193.255,66.294 ; C17.2@193.011,65.933 cw(c193.802,65.248) v1(193.802,66.294) C17.2@193.04,66.294 ; U4.36@193.054,57.517 U4.36@192.43,57.517 193.943,57.517 194.183,57.277 194.183,56.388 194.437,56.134 ; v1@193.643,66.135 ccw(c193.259,65.751) 193.259,66.294 ccw(c193.259,66.837) v1@193.643,66.453 ; C11.2@194.539,81.484 C11.2@194.554,81.469 ; C2.2@194.539,83.135 C2.2@194.564,83.16 ; C10.1@194.554,79.385 C10.1@194.554,79.629 ; C20.1@194.719,56.134 ccw(c194.719,56.423) C20.1@194.923,56.219 ; C20.1@194.878,55.879 ccw(c194.437,55.625) 194.437,56.134 ; C20.1@194.945,56.134 194.437,56.134 ; 197.231,101.854 197.612,101.473 ; v1(197.358,89.916) 197.612,90.17 197.612,101.473 ; v1@197.376,89.898 ccw(c196.805,90.469) 197.612,90.469 ; C12.1@197.435,56.454 ccw(c197.901,56.919) 197.901,56.261 ; C12.1@197.449,56.151 cw(c198.223,55.51) v1@198.223,56.515 ; C12.1@197.454,56.157 cw(c198.055,55.692) 198.055,56.451 ; v1@197.485,89.916 197.485,101.473 ; 197.485,90.766 cw(c196.508,90.766) 197.199,90.075 ccw(c196.202,91.072) 197.612,91.072 ; 197.485,101.346 196.977,101.854 ; C12.1@197.612,55.959 cw(c198.341,55.229) 198.341,56.261 ; C12.1@197.642,55.992 cw(c198.755,55.07) 198.755,56.515 ; C12.1@197.652,56.004 cw(c198.564,55.297) 198.564,56.451 ; C12.1@197.679,56.261 198.755,56.261 ; 197.891,56.515 cw(c197.891,56.91) C12.1@197.612,56.631 ; 197.915,56.515 198.755,56.515 ; 197.993,101.854 197.612,101.473 ; 198.044,56.451 cw(c198.044,57.063) C12.1@197.612,56.631 ; 198.066,56.451 ccw(c198.066,56.785) v1@198.399,56.768 ; v1@198.149,56.781 cw(c197.803,56.799) 197.803,56.451 198.564,56.451 ; v1@198.265,57.08 cw(c198.164,56.896) v1@198.374,56.896 ; v1@198.351,57.287 ccw(c198.721,57.122) v1@198.435,56.835 ; v1@198.375,56.794 cw(c198.357,56.396) 198.755,56.396 ; v1@198.434,56.552 cw(c198.54,56.173) 198.818,56.452 ; v1@198.483,57.08 ccw(c198.584,56.896) v1@198.374,56.896 ; 198.504,56.261 cw(c198.504,57.523) C12.1@197.612,56.631 ; v1@198.579,57.185 ccw(c199.076,56.963) 198.691,56.579 ; v1@198.599,56.769 ccw(c199.449,56.769) 198.848,56.168 ; LED4.2@203.855,55.646 ccw(c202.985,54.776) 202.985,56.007 ccw(c202.985,57.238) LED4.2@203.855,56.368 ; LED1.2@203.855,101.493 ccw(c202.985,100.623) 202.985,101.854 ccw(c202.985,103.085) LED1.2@203.855,102.215 ; LED4.2@204.089,56.007 199.263,56.007 ; LED1.2@204.216,101.854 197.612,101.854 ; 162.941,103.378 164.465,101.854 196.977,101.854 ; 196.977,101.854 197.612,101.854 ; 197.612,101.473 197.612,101.854 ; v1@198.374,56.896 198.755,56.515 ; 198.564,56.451 198.755,56.261 ; 198.755,56.261 198.755,56.515 ; 198.755,56.261 199.009,56.007 199.263,56.007 ; 198.755,56.515 199.263,56.007 ; v1@198.383,56.544 cw(c198.414,55.793) 198.945,56.325 ccw(c198.414,55.793) v1@198.383,56.544
  Bottom Layer w0.3: v1@181.469,42.912 cw(c181.127,42.57) 181.61,42.57 cw(c182.093,42.57) v1@181.751,42.912 ; v1(181.61,43.053) 181.61,39.243 182.118,38.735 184.277,38.735 184.437,38.575 U3.5@184.437,37.084
  Bottom Layer w0.4: v1(201.864,70.165) D4.5@202.898,70.165 ; v1@201.97,70.059 cw(c202.226,69.803) 202.226,70.165 cw(c202.226,70.527) v1@201.97,70.271
  Bottom Layer w0.45: LED3.2@157.952,55.59 cw(c157.252,54.89) 158.242,54.89 cw(c159.232,54.89) LED3.2@158.532,55.59 ; LED3.2@158.242,56.007 158.242,54.864 158.877,54.229 169.291,54.229 169.989,54.927 ; R10.2@169.861,56.133 cw(c169.552,55.823) 169.989,55.823 cw(c170.427,55.823) R10.2@170.118,56.133 ; R10.2@169.989,56.261 169.989,54.927 ; v1(172.212,54.864) 170.053,54.864 169.989,54.927 ; J4.1@175.898,50.77 ccw(c175.6,51.068) 176.022,51.068 ccw(c176.444,51.068) J4.1@176.146,50.77 ; J4.1@176.022,50.546 176.022,51.711 D8.1@176.889,52.578 176.889,53.699 177.419,54.229 R34.2@179.006,54.229 ; 176.122,51.811 ccw(c175.595,52.338) D8.1@176.323,52.497 ; D8.1@176.624,52.843 ccw(c175.984,53.483) 176.889,53.483 ccw(c177.794,53.483) D8.1@177.154,52.843 ; L2.1@177.484,76.554 cw(c177.793,76.245) 177.793,76.683 cw(c177.793,77.121) L2.1@177.484,76.811 ; R7.1@177.762,68.428 R7.1@177.8,68.389 ; 178.403,76.683 cw(c178.403,75.901) C7.2@178.956,76.453 ; C7.2@178.638,76.135 ccw(c177.317,74.817) L2.1@177.317,76.683 178.309,76.683 C7.2@178.766,76.225 179.072,76.531 C16.1@180.111,76.531 v1(180.111,77.318) ; R34.2@178.84,54.101 ccw(c178.53,53.791) 178.53,54.229 ccw(c178.53,54.667) R34.2@178.84,54.357 ; C7.2@178.894,76.135 cw(c179.85,75.18) C16.1@179.85,76.531 ; C16.1@179.945,76.403 ccw(c179.635,76.093) 179.635,76.531 ccw(c179.635,76.969) C16.1@179.945,76.659 ; C16.1@179.983,76.659 ccw(c179.673,76.969) 180.111,76.969 ccw(c180.549,76.969) C16.1@180.24,76.659 ; C17.2@192.761,66.117 C17.2@192.965,65.913 ; C17.2@192.761,66.244 C17.2@192.811,66.294 ; C17.2@192.927,65.989 cw(c193.664,65.252) v1@193.664,66.294 ; C17.2@192.927,66.245 ccw(c193.729,67.047) 193.729,65.913 ; C17.2@193.04,66.294 C17.2@192.811,66.294 ; v1@193.477,66.293 ccw(c193.858,66.294) 193.858,65.913 ; v1@193.691,66.352 cw(c192.965,66.734) C17.2@192.965,65.913 ; 193.709,65.913 ccw(c193.709,66.343) v1@194.09,66.143 ; v1@193.802,66.169 cw(c193.802,65.561) v1@194.232,65.991 ; v1@193.927,66.294 ccw(c194.31,66.296) v1(194.31,65.913) ; D1.1@194.067,54.897 ccw(c195.067,55.897) 195.067,54.483 ; v1@194.185,65.913 ccw(c193.802,65.911) v1(193.802,66.294) ; C11.2@194.41,81.612 ccw(c194.101,81.922) 194.539,81.922 ccw(c194.977,81.922) C11.2@194.667,81.612 ; C2.2@194.41,83.007 cw(c194.101,82.697) 194.539,82.697 cw(c194.977,82.697) C2.2@194.667,83.007 ; C11.2@194.539,81.484 C2.2@194.539,83.135 ; L1.1@194.539,84.747 L1.1@194.564,84.772 ; L1.1@194.564,84.992 ccw(c194.564,86.288) 195.481,85.372 ; L1.1@194.692,84.644 cw(c195.002,84.335) 195.002,84.772 cw(c195.002,85.21) L1.1@194.692,84.901 ; C20.1@194.994,55.815 cw(c194.684,55.506) 195.122,55.506 cw(c195.56,55.506) C20.1@195.25,55.815 ; 195.122,54.941 C20.1@195.122,55.982 ; v1(195.834,88.392) 195.834,85.725 ; 196.181,54.83 ccw(c195.119,55.892) C12.1@196.586,56.214 ; 196.723,55.344 cw(c197.398,55.344) C12.1@197.111,55.955 ; C12.1@196.723,55.904 196.723,55.372 ; 196.762,55.411 ccw(c196.072,56.101) C12.1@197.025,56.311 ; C12.1@196.977,56.158 C12.1@197.114,56.295 197.114,55.763 196.723,55.372 ; C17.2@192.811,66.294 v1(193.802,66.294) ; C17.2@192.965,65.913 v1(194.31,65.913) ; v1(193.802,66.294) 193.929,66.294 v1(194.31,65.913) ; L1.1@194.564,84.772 194.881,84.772 195.834,85.725 ; L1.1@194.564,84.772 195.389,84.772 195.834,85.217 195.834,85.725 ; 196.215,54.864 195.683,54.864 194.818,54.864 194.437,54.483 195.834,54.483 196.215,54.864 ; 196.215,54.864 196.723,55.372
  Bottom Layer w0.6: J1.11@198.349,79.962 J1.4@203.86,79.962
  Bottom Layer w0.65: C1.2@174.65,68.428 C1.2@174.802,68.428 176.365,68.428 R8.1@176.403,68.389 R7.1@177.8,68.389 ; C18.2@181.712,64.466 v1(181.712,65.38) ; R9.1@183.134,68.389 183.197,68.453 v1(184.023,68.453) ; R24.1@185.674,52.514 R25.1@186.944,52.514 v1@186.944,51.816 ; R25.1@186.944,52.363 ccw(c187.872,52.363) v1@187.216,51.707 ; motor.2@191.897,52.895 v1(191.897,53.975) ; C10.1@194.341,79.239 ccw(c195.192,80.47) 196.251,79.411 ; C10.1@194.36,79.029 cw(c193.89,78.559) 194.554,78.559 cw(c195.218,78.559) C10.1@194.748,79.029 ; C10.1@194.36,79.741 ccw(c193.89,80.211) 194.554,80.211 ccw(c195.218,80.211) C10.1@194.748,79.741 ; L1.1@194.539,84.747 194.554,84.732 194.554,83.135 C10.1@194.554,79.385 194.554,78.569 ; v1@194.554,78.105 v1@194.554,78.115 ; v1@194.582,78.123 ccw(c195.271,78.812) v1@195.271,77.837 ; v1@194.586,78.093 cw(c195.408,77.619) 195.408,78.569 ; v1@194.652,78.105 cw(c194.652,77.177) v1@195.308,77.833 ; C10.1@194.71,79.773 ccw(c195.643,81.121) 196.802,79.962 ; v1@195.35,77.843 cw(c195.707,77.73) 195.707,78.105 ; v1@195.39,77.788 cw(c195.756,77.421) v1@196.073,77.831 ; v1@195.414,78.105 cw(c195.414,77.177) v1@196.07,77.833 ; 195.683,54.864 196.723,55.904 C12.1@197.114,56.295 C12.1@197.392,56.295 ; v1@196.064,77.843 ccw(c195.707,77.73) 195.707,78.105 ; v1@196.113,77.851 cw(c197.706,77.851) 196.58,78.978 ; 196.368,55.549 ccw(c195.622,56.295) C12.1@196.677,56.295 ; 196.973,79.371 cw(c198.099,78.245) J1.11@198.099,79.837 ; C12.1@197.276,56.57 ccw(c197.276,57.513) 197.943,56.846 ; C12.1@197.464,56.367 cw(c198.374,55.457) v1@198.374,56.744 ; C12.1@197.646,56.295 C12.1@197.392,56.295 ; J1.11@197.814,79.577 ccw(c197.429,79.962) J1.11@197.974,79.962 ; J1.11@198.199,79.962 v1(196.088,77.851) 196.074,77.837 194.832,77.837 v1(194.564,78.105) ; v1@198.374,56.642 v1(198.374,56.769) 198.374,56.896 v1(198.374,57.277) C12.1@197.392,56.295 ; v1@194.554,78.115 194.554,78.569 ; v1@194.554,78.115 v1(194.564,78.105) ; 194.554,78.569 195.409,78.569 ; v1(194.564,78.105) 195.707,78.105 ; 195.409,78.569 196.802,79.962 ; 195.707,78.105 197.564,79.962 196.802,79.962
  other v1: 187.198,51.689
+3.3VDDIO: C6.2 L2.2 U2.5 | length 12
  Bottom Layer w0.25: C6.2@174.194,76.225 174.194,75.869 174.625,75.438 177.546,75.438 178.879,74.105 U2.5@180.163,74.105 ; C6.2@174.426,76.028 ccw(c174.705,75.837) 174.466,75.597
  Bottom Layer w0.45: C6.2@174.322,76.097 cw(c174.632,75.787) 174.632,76.225 cw(c174.632,76.663) C6.2@174.322,76.354 ; 175.205,76.225 ccw(c175.205,77.064) L2.2@175.828,76.503 ; L2.2@175.493,76.804 cw(c174.194,77.974) C6.2@174.194,76.225 175.209,76.225 L2.2@175.666,76.683
+12V: D2.2 D3.1 D7.1 R30.2 | length 28
  Bottom Layer w0.8: D2.2@160.603,66.177 ccw(c160.536,67.183) 161.544,67.183 ; D2.2@160.656,65.379 ccw(c160.593,66.328) 161.544,66.328 ; D2.2@160.706,65.608 161.544,66.445 161.544,67.183 ; D2.2@160.706,66.345 161.544,67.183 ; D2.2@161.125,65.78 cw(c162.633,66.094) 161.544,67.183 ; 161.53,82.176 ccw(c164.093,82.176) D3.1@162.281,80.364 ; R30.2@161.53,83.185 161.53,80.507 D3.1@162.027,80.01 161.544,79.527 D7.1@161.544,77.343 161.544,67.183 ; D7.1@161.544,77.878 cw(c164.059,77.878) D3.1@162.281,79.656
+12V_IN: J1.1 J1.8 R30.1 | length 70.7
  VCC w0.8: v1(166.116,83.185) 166.116,80.899 ; 166.941,80.074 166.116,80.899 ; 194.12,80.074 195.516,81.471 ; 195.516,82.487 cw(c196.913,82.487) 195.926,83.474 ; 195.516,82.99 cw(c196.019,82.99) 195.955,83.489 ; 195.516,83.376 195.516,82.55 ; 195.961,82.423 195.961,81.915 ; 196.85,85.979 195.961,85.09 195.961,84.328 ; 199.009,85.344 199.644,85.344 v1(200.279,85.979) ; v1@199.485,85.94 ccw(c199.861,86.397) v1(200.279,85.979) ; 166.116,80.899 166.116,80.391 166.433,80.074 191.77,80.074 194.755,80.074 195.961,81.28 195.961,81.915 ; 195.516,81.471 195.961,81.915 ; 195.516,81.471 195.516,82.55 ; 195.516,82.55 195.516,85.281 196.215,85.979 v1(199.517,85.979) ; 195.961,81.915 195.961,84.328 ; 195.961,84.328 196.977,85.344 198.882,85.344 v1(199.517,85.979) ; v1(199.517,85.979) v1(200.279,85.979)
  Bottom Layer w0.8: R30.1@163.83,83.185 v1(166.116,83.185) v1(166.116,82.296) 165.227,83.185 ; J1.8@198.349,86.087 J1.1@203.86,86.087